# Altium PCB MCU_Ver1.PcbDoc
Units mil, origin at the board's own origin, x right, y up, seen from the top; angles counter-clockwise.
Board outline 2825.45 x 1434.1 mil, 2 copper layers (Top Layer, Bottom Layer); 41 components, 41 nets, 199 pads, 17 vias.
Unrouted connection lines stored in the file: 33.
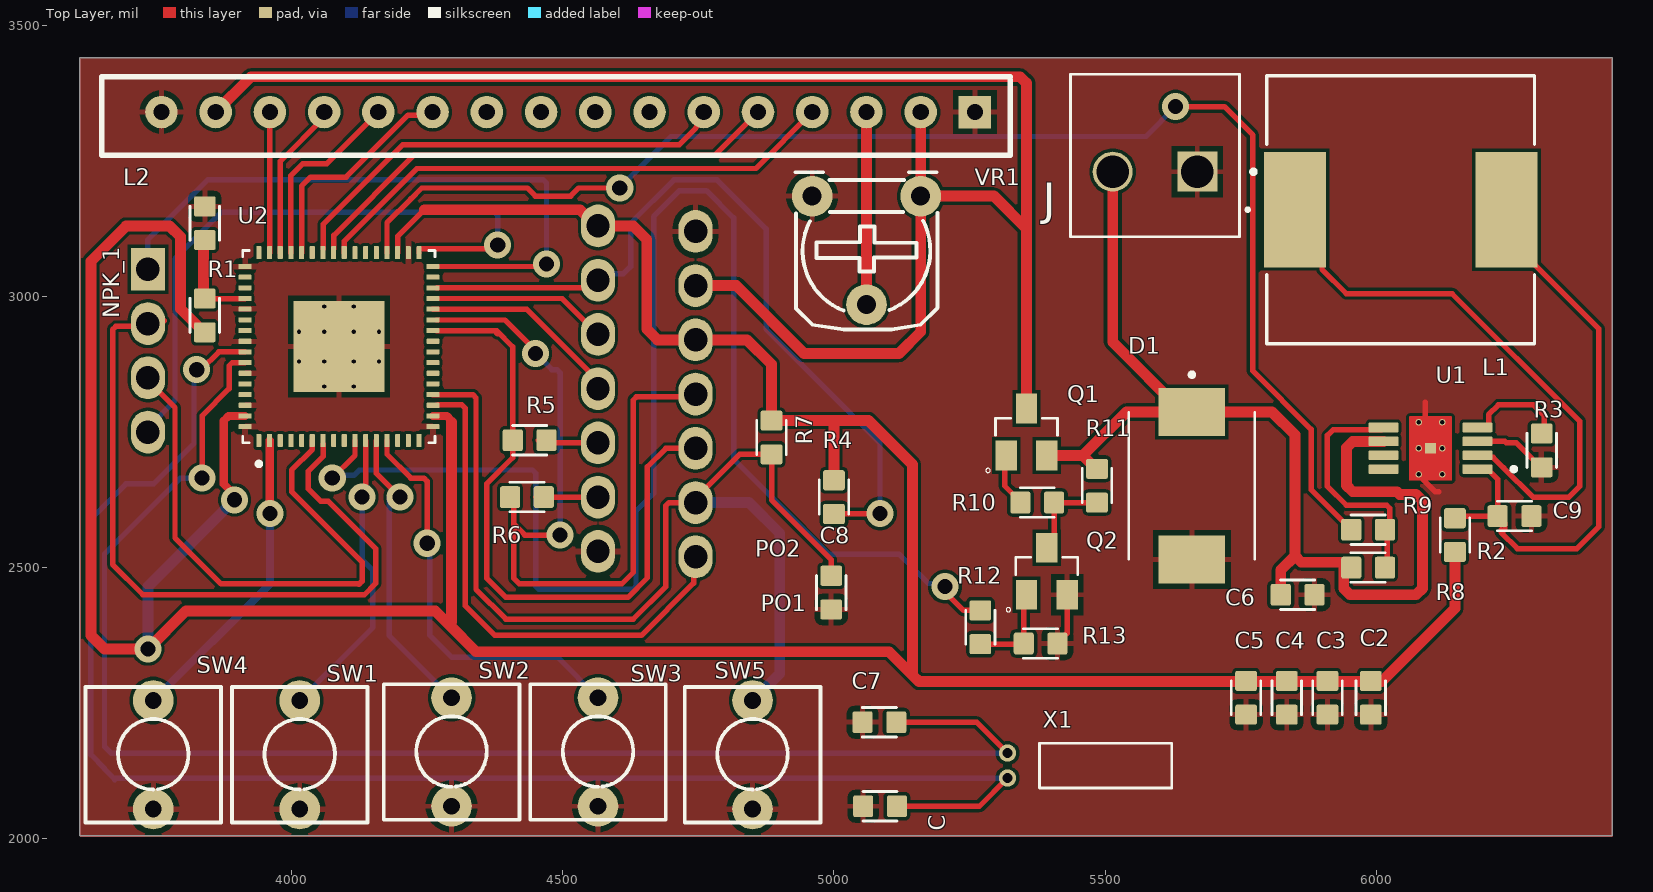
[diagram p0: Top Layer view]
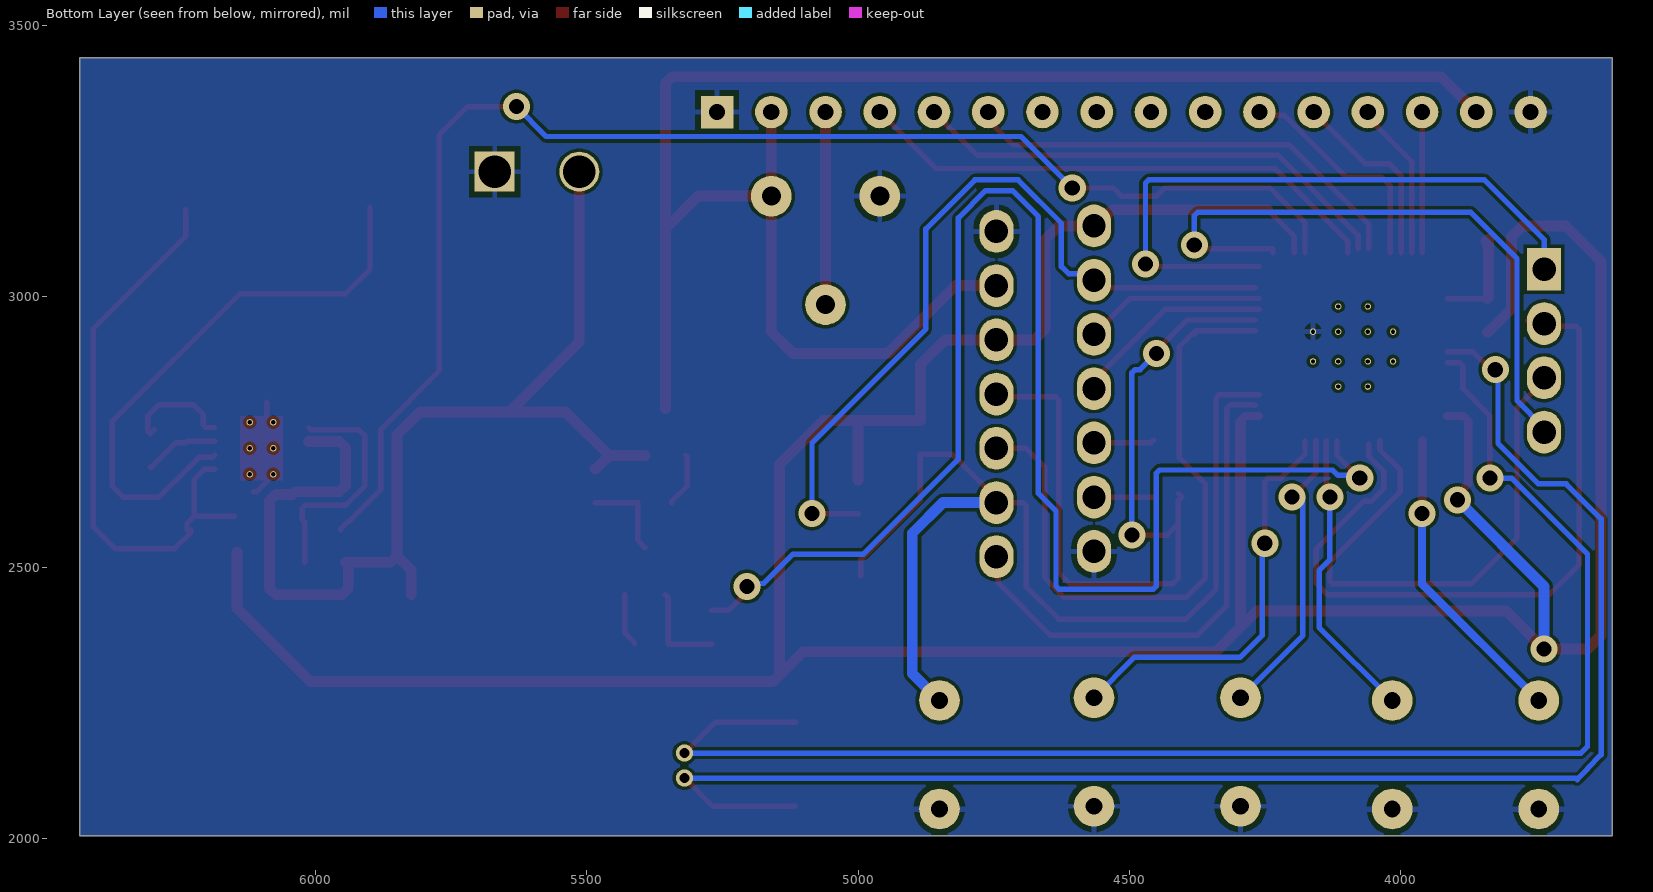
[diagram p1: Bottom Layer view, seen from below]
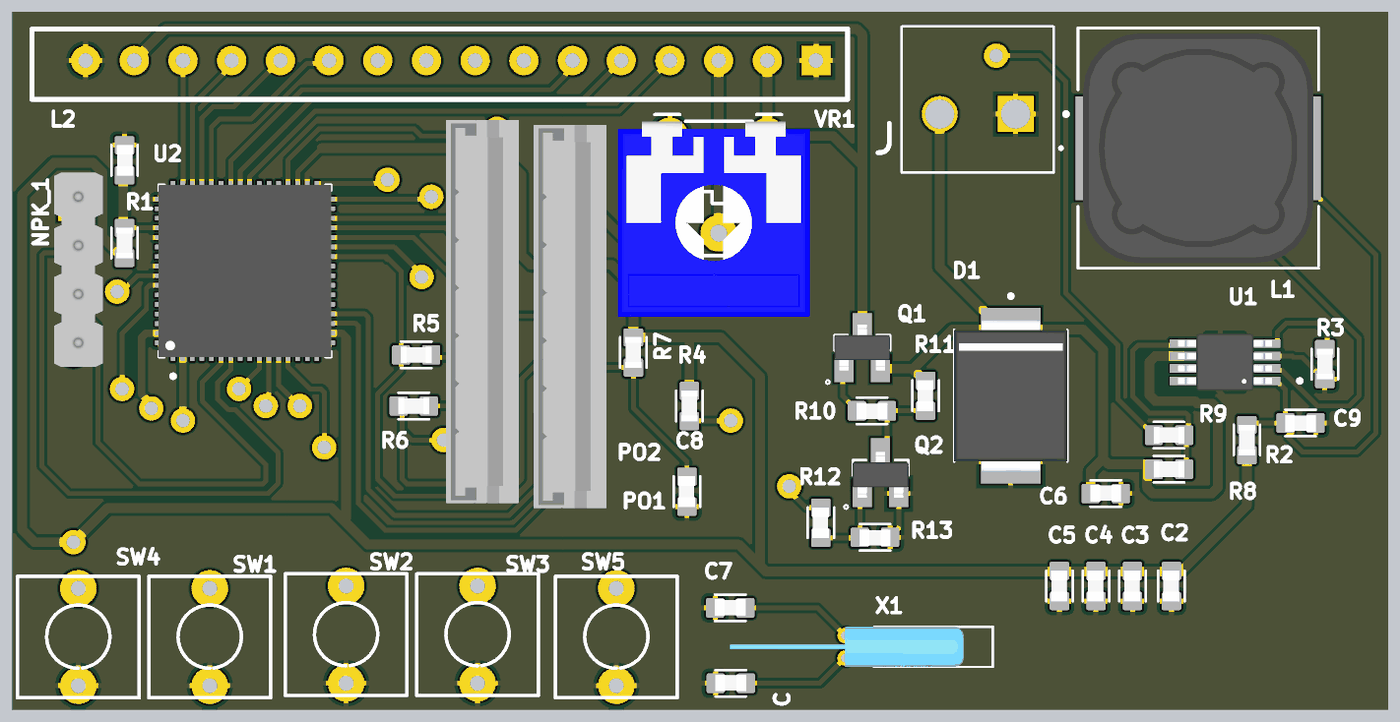
[diagram p2: 3D render of the assembled board from above, using the file's embedded part models]

## Layer stack, top to bottom
Top Solder: solder mask 0.4, Solder Resist, Dk 3.5
Top Layer: signal copper 1.4
Dielectric 1: dielectric 12.6, FR-4, Dk 4.8
Bottom Layer: signal copper 1.4
Bottom Solder: solder mask 0.4, Solder Resist, Dk 3.5

## Board outline
3609.55,2005.9 6435,2005.9 6435,3440 3609.55,3440

## Design rules (kind name [scope] priority, off if disabled: settings)
Clearance [All] p1: gap=5.91 ignorepadtopadclearanceinfootprint=FALSE
PolygonConnect [All] p1: connectstyle=Relief reliefconductorwidth=10 reliefentries=4 polygonreliefangle="90 Angle" airgapwidth=10
RoutingVias [All] p1: holewidth=28 width=50 viastyle="Through Hole" minholewidth=28 minwidth=50 maxholewidth=28 maxwidth=50
SolderMaskExpansion [All] p1: expansion=4 istentingtop=FALSE
Width [All] p1: maxlimit=20 minlimit=10 preferedwidth=15
30 further rules are at their usual default settings.

## Components (designator, comment, footprint, x,y, rotation, side; value= is the part's Value field where it differs from the comment)
C "22pF" CAPC0603X33N 5055,2060 r0 top
C1 "100n" CAPC0603X33N 3840,3165 r270 top
C2 "100n" CAPC0603X33N 5990,2230 r90 top
C3 "100n" CAPC0603X33N 5910,2230 r90 top
C4 "100n" CAPC0603X33N 5835,2230 r90 top
C5 "100n" CAPC0603X33N 5760,2230 r90 top
C6 "4.7u" CAPC0603X33N 5825,2450 r0 top
C7 "22pF" CAPC0603X33N 5053.9,2215 r0 top
C8 "1n1" CAPC0603X33N 4995,2423.9 r90 top
C9 "10u" CAPC0603X33N 6285,2595 r180 top
D1 "MBRS340T3" DIOM7959X261N 5660,2651.02 r270 top
J "640388-2" TE_640388-2 5670,3230 r0 top
L1 "2.2uH" IND_CDRH127/LDNP-470MC_SUM 6045,3160 r0 top
L2 "25/02/2025" PCBComponent_1#1 5260,3340 r180 top
NPK_1 "NPK" PCBComponent_1#2 3735,3050 r270 top
PO1 "MNTT 23/9/2023" PCBComponent_1#3 4565,3130 r270 top
PO2 "MNTT 23/9/2023" PCBComponent_1#3 4745,3120 r270 top
Q1 "FDN340P" SOT95P240X120-3N 5355,2750 r90 top
Q2 "MMBT3904LT1G" SOT95P240X111-3N 5392.6,2493.31 r90 top
R1 "0" RESC1608X50N 3840,2965 r90 top
R2 "0" RESC1608X50N 6145,2560 r270 top
R3 "52.3K" RESC1608X50N 6305,2716.1 r90 top
R4 "0" RESC1608X50N 5000,2630 r270 top
R5 "0" RESC1608X50N 4438.9,2735 r180 top
R6 "0" RESC1608X50N 4433.9,2630 r180 top
R7 "4k7" RESC1608X50N 4885,2740 r270 top
R8 "0" RESC1608X50N 5985,2500 r0 top
R9 "0" RESC1608X50N 5985,2570 r0 top
R10 "150" CAPC0603X33N 5405,2620 r180 top
R11 "10K" CAPC0603X33N 5485,2621.1 r90 top
R12 "4.7K" CAPC0603X33N 5270,2360 r90 top
R13 "47K" CAPC0603X33N 5411.1,2360 r180 top
SW1 "SW" SW2 4015,2255 r270 top value="SW chip 2 pin"
SW2 "SW" SW2 4295,2260 r270 top value="SW chip 2 pin"
SW3 "SW" SW2 4565,2260 r270 top value="SW chip 2 pin"
SW4 "SW" SW2 3745,2255 r270 top value="SW chip 2 pin"
SW5 "SW" SW2 4850,2255 r270 top value="SW chip 2 pin"
U1 "24/02/2025" SOP65P490X110-9N 6100,2720 r180 top
U2 "21/2/2025" IC_BQ500215RGCR 4087.36,2907.64 r90 top
VR1 "103" VR 5160,3185 r180 top value="VR 10K"
X1 "AB26T-32.768KHZ-E" XTAL_AB26T-32.768KHZ-E 5320,2135 r180 top

## Footprints (in the part's own frame and the unit in brackets; to place one, negate y for a bottom-side part, rotate by r counter-clockwise, add the part's x,y. Pads: shape width x height; smd on the part's side, far side on the other; paste and mask are expansions set on the pad)
CAPC0603X33N [mm]
  rrect20% 0.94x1.02 smd: 1(-0.028,0) 2(1.552,0)
  silkscreen extent -0.04,-0.69 1.56,0.69, body extent -0.04,-0.41 1.56,0.45, height 0.89
DIOM7959X261N [mm]
  rect 2.25x3.12 smd: A(3.455,0) C(-3.455,0)
  silkscreen extent -5.3,-2.95 3.44,2.95, body extent -3.98,-2.95 3.98,2.95, height 2.62
IC_BQ500215RGCR [mm]
  rrect25% 0.6x0.24 smd: 1(-4.4,3.75) 2(-4.4,3.25) 3(-4.4,2.75) 4(-4.4,2.25) 5(-4.4,1.75) 6(-4.4,1.25) 7(-4.4,0.75) 8(-4.4,0.25) 9(-4.4,-0.25) 10(-4.4,-0.75) 11(-4.4,-1.25) 12(-4.4,-1.75) 13(-4.4,-2.25) 14(-4.4,-2.75) 15(-4.4,-3.25) 16(-4.4,-3.75) 33(4.4,-3.75) 34(4.4,-3.25) 35(4.4,-2.75) 36(4.4,-2.25) 37(4.4,-1.75) 38(4.4,-1.25) 39(4.4,-0.75) 40(4.4,-0.25) 41(4.4,0.25) 42(4.4,0.75) 43(4.4,1.25) 44(4.4,1.75) 45(4.4,2.25) 46(4.4,2.75) 47(4.4,3.25) 48(4.4,3.75)
  rrect25% 0.24x0.6 smd: 17(-3.75,-4.4) 18(-3.25,-4.4) 19(-2.75,-4.4) 20(-2.25,-4.4) 21(-1.75,-4.4) 22(-1.25,-4.4) 23(-0.75,-4.4) 24(-0.25,-4.4) 25(0.25,-4.4) 26(0.75,-4.4) 27(1.25,-4.4) 28(1.75,-4.4) 29(2.25,-4.4) 30(2.75,-4.4) 31(3.25,-4.4) 32(3.75,-4.4) 49(3.75,4.4) 50(3.25,4.4) 51(2.75,4.4) 52(2.25,4.4) 53(1.75,4.4) 54(1.25,4.4) 55(0.75,4.4) 56(0.25,4.4) 57(-0.25,4.4) 58(-0.75,4.4) 59(-1.25,4.4) 60(-1.75,4.4) 61(-2.25,4.4) 62(-2.75,4.4) 63(-3.25,4.4) 64(-3.75,4.4)
  rect 4.25x4.25 smd paste-1.53: 65(0,0)
  round 0.3 hole 0.2 mask+0: 66(-0.695,1.875) 67(0.695,1.875) 68(-1.875,0.695) 69(-0.695,0.695) 70(0.695,0.695) 71(1.875,0.695) 72(-1.875,-0.695) 73(-0.695,-0.695) 74(0.695,-0.695) 75(1.875,-0.695) 76(-0.695,-1.875) 77(0.695,-1.875)
  silkscreen extent -5.59,-4.5 4.5,4.5, body extent -4.5,-4.5 4.5,4.5, height 1
IND_CDRH127/LDNP-470MC_SUM [mil]
  rect 114x213 smd: 1(-195,0) 2(195,0)
  silkscreen extent -285,-247 247,247, body extent -236,-236 236,236, height 315
PCBComponent_1#1 [mil]
  rect 60x60 hole 30: 1(0,0)
  round 60 hole 30: 2(100,0) 3(200,0) 4(300,0) 5(400,0) 6(500,0) 7(600,0) 8(700,0) 9(800,0) 10(900,0) 11(1000,0) 12(1100,0) 13(1200,0) 14(1300,0) 15(1400,0) 16(1500,0)
  silkscreen extent -65,-65 1610,80
PCBComponent_1#2 [mil]
  rect 78.74x62.99 hole 43.41: 1(0,0)
  oval 78.74x62.99 hole 43.41: 2(100,0) 3(200,0) 4(300,0)
  body extent -60,-40 340,60, height 252
PCBComponent_1#3 [mil]
  oval 78.74x62.99 hole 43.31: 1(0,0) 2(100,0) 3(200,0) 4(300,0) 5(400,0) 6(500,0) 7(600,0)
  body extent -87,-65 700,85, height 300
RESC1608X50N [mm]
  rrect20% 0.94x1.02 smd: 1(-0.79,0) 2(0.79,0)
  silkscreen extent -0.8,-0.69 0.8,0.69, body extent -0.8,-0.43 0.8,0.43, height 0.48
SOP65P490X110-9N [mm]
  rrect20% 1.4x0.45 smd mask+0: 1(-2.2,0.975) 2(-2.2,0.325) 3(-2.2,-0.325) 4(-2.2,-0.975) 5(2.2,-0.975) 6(2.2,-0.325) 7(2.2,0.325) 8(2.2,0.975)
  rect 0.5x0.5 smd paste-1 mask+0: 9(0,0)
  round 0.3 hole 0.2 mask+0: 10(-0.55,1.22) 11(0.55,1.22) 12(-0.55,0) 13(0.55,0) 14(-0.55,-1.22) 15(0.55,-1.22)
  Top Layer region: 0.958,1.499 0.96,1.499 0.963,1.498 0.965,1.498 0.968,1.497 0.97,1.496 0.973,1.495 0.975,1.493 0.977,1.492 0.979,1.49 0.981,1.489 0.983,1.487 0.985,1.485 0.987,1.483 0.989,1.481 0.99,1.479 0.992,1.477 0.993,1.475 0.995,1.473 0.996,1.47 0.997,1.468 0.998,1.465 0.998,1.463 0.999,1.46 0.999,1.458 1,1.455 1,1.453 1,1.45 1,-1.45 1,-1.453 1,-1.455 0.999,-1.458 0.999,-1.46 0.998,-1.463 0.998,-1.465 0.997,-1.468 0.996,-1.47 0.995,-1.473 0.993,-1.475 0.992,-1.477 0.99,-1.479 0.989,-1.481 0.987,-1.483 0.985,-1.485 0.983,-1.487 0.981,-1.489 0.979,-1.49 0.977,-1.492 0.975,-1.493 0.973,-1.495 0.97,-1.496 0.968,-1.497 0.965,-1.498 0.963,-1.498 0.96,-1.499 0.958,-1.499 0.955,-1.5 -0.955,-1.5 -0.958,-1.499 -0.96,-1.499 -0.963,-1.498 -0.965,-1.498 -0.968,-1.497 -0.97,-1.496 -0.973,-1.495 -0.975,-1.493 -0.977,-1.492 -0.979,-1.49 -0.981,-1.489 -0.983,-1.487 -0.985,-1.485 -0.987,-1.483 -0.989,-1.481 -0.99,-1.479 -0.992,-1.477 -0.993,-1.475 -0.995,-1.473 -0.996,-1.47 -0.997,-1.468 -0.998,-1.465 -0.998,-1.463 -0.999,-1.46 -0.999,-1.458 -1,-1.455 -1,-1.453 -1,-1.45 -1,1.45 -1,1.453 -1,1.455 -0.999,1.458 -0.999,1.46 -0.998,1.463 -0.998,1.465 -0.997,1.468 -0.996,1.47 -0.995,1.473 -0.993,1.475 -0.992,1.477 -0.99,1.479 -0.989,1.481 -0.987,1.483 -0.985,1.485 -0.983,1.487 -0.981,1.489 -0.979,1.49 -0.977,1.492 -0.975,1.493 -0.973,1.495 -0.97,1.496 -0.968,1.497 -0.965,1.498 -0.963,1.498 -0.96,1.499 -0.958,1.499 -0.955,1.5 0.955,1.5
  silkscreen extent -4,0.88 -3.8,1.07, body extent -2.45,-1.5 2.45,1.5, height 1.1
SOT95P240X111-3N [mm]
  rect 1.4x1 smd: 1(-1.1,0.95) 2(-1.1,-0.95) 3(1.1,0)
  silkscreen extent -1.9,-1.45 0.65,1.9, body extent -1.33,-1.46 1.07,1.46, height 1.21
SOT95P240X120-3N [mm]
  rect 1.4x1 smd: 1(-1.1,0.95) 2(-1.1,-0.95) 3(1.1,0)
  silkscreen extent -1.9,-1.45 0.65,1.9, body extent -1.2,-1.46 1.2,1.46, height 1.21
SW2 [mil] "SW button 2pin, 250x 250 mil"
  round 75 hole 31: 1(0,0) 2(200,0)
  silkscreen extent -25,-125 225,125
TE_640388-2 [mil]
  rect 73.78x73.78 hole 60: 1(0,0)
  round 73.78 hole 60: 2(-155.91,0)
  silkscreen extent -234,-120 107,180
VR [mil] "Resistor Variable"
  round 75 hole 35: 1(0,0) 2(100,200) 3(200,0)
  silkscreen extent -31,-44 231,246, body extent -87,-30 307,372, height 165
XTAL_AB26T-32.768KHZ-E [mm]
  round 0.81 hole 0.46: 1(0,0.585) 2(0,-0.585)
  silkscreen extent -7.7,-1.05 -1.5,1.05, body extent -6.2,-1.05 6,1.06, height 1.05

## Part data
C C1 C2 C3 C4 C5 C6 C7 C8 C9: library part GRM033R71H102KA12D, "SMD Capacitor X7R_EIA_ with Capacitance: 1000pF Tol. 10%. Rated Voltage: 50Vdc", Package="0603 Taiyo Yuden", Digi-Key_Part_Number=490-10682-1-ND, Digi-Key_Purchase_URL=https://www.digikey.com/product-detail/en/murata-electronics/GRM033R71H102KA12D/490-10682-1-ND/5251423?utm_source=snapeda&utm_medium=aggregator&utm_campaign=symbol, MF=Murata, MP=GRM033R71H102KA12D, SnapEDA_Link=https://www.snapeda.com/parts/GRM033R71H102KA12D/Murata/view-part/4374985/?ref=snap
D1: "Diode Schottky 40V 4A Surface Mount SMC", Package="SMC-2 ON Semiconductor", Check_prices=https://www.snapeda.com/parts/MBRS340T3/Onsemi/view-part/?ref=eda, MF="ON Semiconductor", MP=MBRS340T3, SnapEDA_Link=https://www.snapeda.com/parts/MBRS340T3/Onsemi/view-part/?ref=snap
J: "Header; Conn; Interconnect System; PCB Plug; 2 Cont; Solder; MTA-156 Series; Straight", Package=None, Availability=Unavailable, EU_RoHS_Compliance=Compliant, MF="TE Connectivity", MP=640388-2, Price=None, SnapEDA_Link=https://www.snapeda.com/parts/640388-2/TE%20Connectivity%20AMP%20Connectors/view-part/437691/?ref=snap, TE_purchase_URL=https://www.te.com/usa-en/product-640388-2.html?te_bu=Cor&te_type=disp&te_campaign=seda_glo_cor-seda-global-disp-prtnr-fy19-seda-model-bom-cta_sma-317_1&elqCampaignId=32493
L1: library part CDRH127/LDNP-470MC, "47 ÂµH Shielded - Inductor 3.25 A 78mOhm Max Nonstandard", Package="Nonstandard Sumida", Availability="In Stock", Check_prices=https://www.snapeda.com/parts/CDRH127/LDNP-470MC/Sumida+America+Components+Inc./view-part/?ref=eda, MF="Sumida America", MP=CDRH127/LDNP-470MC, Price=None, Purchase-URL=https://pricing.snapeda.com/search/part/CDRH127/LDNP-470MC/?ref=eda, SnapEDA_Link=https://www.snapeda.com/parts/CDRH127/LDNP-470MC/Sumida+America+Components+Inc./view-part/?ref=snap
L2: library part LCD1602
NPK_1: "02/04/2024. NPK_?"
PO1 PO2: library part "Port 7 pins"
Q1: "FDN340P Series 20V 70 mOhm Single P-Ch Logic Level PowerTrench Mosfet SSOT-3", Package=None, Availability=Unavailable, MP=FDN340P, Price=None
Q2: "Bipolar _BJT_ Transistor NPN 40V 200mA 300MHz 300mW Surface Mount SOT-23-3 _TO-236_", Package="SOT-23-3 NXP Semiconductors", Availability=Unavailable, MF="ON Semiconductor", MP=MMBT3904LT1G, Price=None, SnapEDA_Link=https://www.snapeda.com/parts/MMBT3904LT1G/ON%20Semiconductor/view-part/587490/?ref=snap
R1 R2 R3 R4 R5 R6 R7 R8 R9 R10 R11 R12 R13: library part CRGS0603J180K, "RES SMD 180K OHM 5% 1/4W 0603", Package=None, Availability=Unavailable, MP=CRGS0603J180K, Price=None
SW1 SW2 SW3 SW4 SW5: library part SW2, "Switch button 2 pin"
U1: library part TPS62842DGRR
U2: library part MSP430FR5989_VER2
VR1: library part VR, "Var Resistor"
X1: "32.768kHz WATCH CRYSTAL, 6.2 x 02.1MM CYLINDER PACKAGE", Package="Radial Abracon LLC", Check_prices=https://www.snapeda.com/parts/AB26T-32.768KHZ-E/Abracon/view-part/?ref=eda, MF="Abracon LLC", MP=AB26T-32.768KHZ-E, SnapEDA_Link=https://www.snapeda.com/parts/AB26T-32.768KHZ-E/Abracon/view-part/?ref=snap

## Via types
v1: diameter 50, hole 28, Top Layer to Bottom Layer, 17 vias

## Nets (pads, with @x,y where several pads share a name; then routed paths per layer and width w, separated by ;. In a path a pad name is that pad's centre, name@x,y a point inside that pad or via, vN(x,y) a via of type N, cw(c..) or ccw(c..) an arc to the next point about the centre after c; other vN are vias at no path point)
3V3: C2.2 C3.2 C4.2 C5.2 PO1.1 PO2.3 R1.1 R2.2 R4.1 R7.1 U2.18 U2.35 U2.63 | length 6660.3
  Top Layer w10: U2.35 4195.63,3110.63 4245,3160
  Top Layer w15: v1(3895,2625) 3895,2634.47 3875,2654.47 3875,2770.9 3883.79,2779.68 U2.63 ; U2.18 4286.21,2779.68 4295,2770.9 4295,2767.93
  Top Layer w20: R1.1 3838.43,2933.9 3795,2977.32 3795,3110 3775,3130 3695,3130 3630,3065 3630,2375 3655,2350 v1(3735,2350) 3805,2420 4265,2420 4290,2395 ; 4245,3160 4531.79,3160 4561.79,3130 4630,3130 4655,3105 4655,2940 4675,2920 PO2.3 4840,2920 4885,2875 R7.1 4995,2771.1 ; 4295,2767.93 4295,2400 4290,2395 ; R4.1 5000,2766.1 4995,2771.1 ; R2.2 6145,2425 6010,2290 5156.72,2290 5145,2301.72 ; 4290,2395 4340,2345 5101.72,2345 5145,2301.72 ; 4995,2771.1 5063.9,2771.1 5145,2690 5145,2301.72
  Bottom Layer w20: v1(3735,2350) 3735,2465 v1(3895,2625)
5V: L2.2 L2.15 PO2.2 Q1.3 VR1.1 | length 3235
  Top Layer w20: L2.15 3925,3405 5343.28,3405 5355,3393.28 5355,3125 ; PO2.2 4820,3020 4945,2895 5120,2895 5160,2935 VR1.1 ; L2.2 VR1.1 ; Q1.3 5355,3125 ; VR1.1 5295,3185 5355,3125
5VControl: R12.2 U2.10 | length 2772.9
  Top Layer w10: v1(4075,2665) 4116.89,2706.89 U2.10 ; v1(5205,2465) 5205,2455 5238.9,2421.1 R12.2
  Bottom Layer w10: v1(4075,2665) 4080,2670 4115,2670 4125,2680 4444.14,2680 4450,2674.14 4450,2465.86 4455.86,2460 4629.14,2460 4635,2465.86 4635,2604.37 4667.5,2636.87 4667.5,3147.5 4715,3195 4765,3195 4815,3145 4815,2700 4990,2525 5120,2525 5174.22,2470.78 5199.22,2470.78 v1(5205,2465)
AVCC: C1.2 R1.2 U2.52 | length 187.9
  Top Layer w10: R1.2@3840.06,2996.16 U2.52 U2.52 ; C1.2@3845,3095 C1.2@3845.06,3095.06
  Top Layer w20: C1.2@3837.5,3105.3 3837.5,2998.6 R1.2 ; C1.2 C1.2@3842.5,3101.4
BT1: SW1.1 U2.11 | length 546.3
  Top Layer w10: v1(4130,2630) 4136.57,2636.57 U2.11
  Bottom Layer w10: SW1.1 4150,2390 4150,2494.59 4130,2514.59 v1(4130,2630)
BT2: SW2.1 U2.12 | length 560.2
  Top Layer w10: U2.12 4156.26,2673.74 v1(4200,2630)
  Bottom Layer w10: v1(4200,2630) 4180,2630 4180,2375 SW2.1
BT3: SW3.1 U2.13 | length 763.9
  Top Layer w10: U2.13 4175.94,2709.06 4220,2665 4244.14,2665 4250,2659.14 v1(4250,2545)
  Bottom Layer w10: v1(4250,2545) 4255,2540 4255,2375 4295,2335 4490,2335 SW3.1
BT4_ISR: SW4.1 U2.2 | length 568.7
  Top Layer w15: U2.2 3959.7,2734.11 3959.7,2600.3 v1(3960,2600)
  Bottom Layer w15: SW4.1 3960,2470 v1(3960,2600)
D4: L2.11 U2.44 | length 420.7
  Top Layer w10: U2.44 4018.46,3203.46 4035,3220 4100.73,3220 4215,3334.26 4254.27,3334.26 L2.11
D5: L2.12 U2.45 | length 351.8
  Top Layer w10: U2.45 3998.78,3222.92 4020.86,3245 4065,3245 L2.12
D6: L2.13 U2.46 | length 292.6
  Top Layer w10: U2.46 3979.09,3249.09 4060,3330 L2.13
D7: L2.14 U2.47 | length 259.4
  Top Layer w10: U2.47 3959.41,3087.4 3960,3087.99 L2.14
DE: NPK_1.3 U2.6 | length 1027.8
  Top Layer w10: NPK_1.3 3735,2845 3785,2795 3785,2555 3870,2470 4123.28,2470 4124.14,2469.14 4130,2475 4130,2510 4000,2640 4000,2680 4038.15,2718.15 U2.6
DI: NPK_1.4 U2.33 | length 1182.2
  Top Layer w10: U2.33 4235,3087.4 4235.28,3087.68 4372.68,3087.68 v1(4380,3095)
  Bottom Layer w10: NPK_1.4 3735,2757.87 3785,2807.87 3785,3070 3870,3155 4374.14,3155 4380,3149.14 v1(4380,3095)
E: L2.6 U2.42 | length 841.8
  Top Layer w10: U2.42@4058.11,3087.68 4058.11,3133.11 4205,3280 4715,3280 4737.29,3302.29 4745.68,3310.68 4745.68,3312.15 4760,3326.47 L2.6
GND: C1.1 C2.1 C3.1 C4.1 C5.1 C6.2 C7.1 C8.1 C9.1 C.1 D1.A J.1 L2.1 L2.16 PO1.7 PO2.1 Q2.2 R3.1 R13.1 SW1.2 SW2.2 SW3.2 SW4.2 SW5.2 U1.3 U1.8 U1.9 U2.17 U2.34 U2.49 U2.53 U2.56 U2.59 U2.62 U2.64 U2.65 U2.77 VR1.3 | length 335.2
  Top Layer w10: R13.1 5412.2,2361.57 5430,2379.37 Q2.2 ; 6070,2678.63 6108.63,2640 ; 6090,2760 6090,2805 ; U1.3 6237.2,2732.8 6240,2730 6258.43,2730 6303.43,2685 R3.1
LFXIN: C.2 U2.57 X1.1 | length 2859.9
  Top Layer w10: v1(3825,2865) 3833.05,2865 3865.84,2897.8 U2.57 ; C.2 5268.03,2060 X1.1
  Bottom Layer w10: v1(3825,2865) 3820,2860 3820,2729.07 3745.46,2654.53 3694.53,2654.53 3630,2590 3630,2155 3655,2130 3655,2128.28 3674.14,2109.14 3676.97,2111.97 X1.1
LFXOUT: C7.2 U2.58 X1.2 | length 2751.1
  Top Layer w10: v1(3835,2665) 3835,2780 3885,2830 3885,2872.25 3890.86,2878.11 U2.58 ; C7.2 5263.03,2215 X1.2
  Bottom Layer w10: v1(3835,2665) 3795,2665 3655,2525 3655,2170 3666.97,2158.03 X1.2
NetC9_2: C9.2 L1.2 R2.1 U1.1 | length 1086.9
  Top Layer w10: R2.1@6150,2595 C9.2 ; U1.1 6205.31,2681.61 6223.9,2663.03 C9.2 ; 6230,2570 6230,2565 6260,2535 6370,2535 6410,2575 6410,2940.5 6240,3110.5 L1.2 ; 6237.4,2570 6237.4,2581.5 C9.2
NetL1_1: L1.1 U1.2 | length 1054.6
  Top Layer w10: L1.1@5900,3165 5900,3050 5945,3005 6140,3005 6375,2770 6375,2650 6355,2630 6289.03,2630 6235.04,2683.99 6215.68,2703.35 6190.47,2703.35 U1.2
NetL2_3: L2.3 VR1.2 | length 355
  Top Layer w20: VR1.2 L2.3
NetPO1_5: PO1.5 R5.1 | length 112.1
  Top Layer w10: R5.1@4455,2735 4460,2730 PO1.5
NetPO1_6: PO1.6 R6.1 | length 115
  Top Layer w10: R6.1@4450,2630 PO1.6
NetQ1_1: Q1.1 R10.2 | length 99.7
  Top Layer w10: Q1.1 5315,2704.09 5315,2650.47 5343.9,2621.57 R10.2
NetQ2_1: Q2.1 R12.1 R13.2 | length 172.6
  Top Layer w10: R12.1 5348.9,2358.9 R13.2 5350,2444.8 Q2.1
NetQ2_3: Q2.3 R10.1 R11.1 | length 167.9
  Top Layer w10: Q2.3 5406.1,2550.12 R10.1 R11.1
NetR3_2: R3.2 U1.4 | length 205.9
  Top Layer w10: U1.4 6203.54,2758.39 6207.4,2762.24 6207.4,2782.4 6225,2800 6290,2800 6310,2780 6310,2752.2 R3.2 R3.2@6297.68,2754.53
NetR8_2: R8.2 R9.2 U1.5 | length 436.4
  Top Layer w10: U1.5 6009.53,2754.53 5994.69,2754.53 5920.74,2754.53 5910,2743.79 5910,2650 5945,2615 6019.14,2615 6025,2609.14 6025,2588.9 6020.55,2584.45 6020.55,2510.55 R8.2@6020,2510
PS_EN: R9.1 U2.36 | length 2578
  Top Layer w10: U2.36 4175.94,3135.94 4219.82,3179.82 4240,3200 4434.59,3200 4449.59,3185 4514.38,3185 4529.38,3200 v1(4605,3200) ; v1(5630,3350) 5720,3350 5772.5,3297.5 5772.5,2862.5 5880,2755 5880,2643.9 5938.82,2585.08 5940.39,2585.08 5953.9,2571.57 R9.1
  Bottom Layer w10: v1(4605,3200) 4700,3295 5575,3295 v1(5630,3350)
RE: NPK_1.2 U2.7 | length 1379.3
  Top Layer w10: NPK_1.2@3765,2955 3755,2945 3675.86,2945 3670,2939.14 3670,2505.86 3725.86,2450 4134.14,2450 4155,2470.86 4155,2535 4067.5,2622.5 4053.71,2622.5 4030.7,2645.52 4030.7,2677.59 4058.11,2705 U2.7@4058.11,2727.6
RO: NPK_1.1 U2.32 | length 1198.5
  Top Layer w10: U2.32 4465.28,3055.28 v1(4470,3060)
  Bottom Layer w10: NPK_1.1 3735,3105 3845,3215 4464.14,3215 4470,3209.14 v1(4470,3060)
RS: L2.4 U2.40 | length 982.6
  Top Layer w10: U2.40 4097.2,3102.2 4230.91,3235.91 4855.91,3235.91 L2.4
RW: L2.5 U2.41 | length 901.4
  Top Layer w10: U2.41@4077.8,3087.68 4077.8,3112.8 4225,3260 4780,3260 L2.5
RXD1: PO2.4 R6.2 U2.27 | length 1495.7
  Top Layer w10: U2.27@4267.4,2956.57 4393.43,2956.57 4450,2900 v1(4450,2895) ; R6.2@4409.22,2636.43 R6.2 4410,2622.8 4410,2580 ; v1(4495,2560) 4430,2560 4410,2580 ; PO2.4 4740,2815 4635.86,2815 4630,2809.14 4630,2491.21 4608.79,2470 4420,2470 4410,2480 4410,2580
  Bottom Layer w10: v1(4450,2895) 4480,2865 4489.14,2865 4495,2859.14 v1(4495,2560)
SBWTCK: PO2.7 U2.19 | length 953.5
  Top Layer w10: U2.19@4267.4,2799.65 4269.64,2799.65 4269.99,2800 4314.14,2800 4320,2794.14 4320,2430 4375,2375 4645,2375 4741.49,2471.49 4741.49,2516.49 PO2.7
SBWTDIO: C8.2 PO2.6 R7.2 SW5.1 U2.20 | length 1997.6
  Top Layer w10: U2.20 4334.14,2819.06 4340,2813.2 4340,2460 4395,2405 4630,2405 4690,2465 4690,2614.14 4695.86,2620 PO2.6 4745,2627.87 4826.02,2708.9 R7.2 4885,2625 4995,2515 C8.2
  Bottom Layer w20: PO2.6 4843.28,2620 4900,2563.28 4900,2305 SW5.1
SIM_MASTER: PO1.2 R4.2 U2.30 | length 1471.5
  Top Layer w10: U2.30@4267.4,3015.91 4550.91,3015.91 PO1.2 ; R4.2 5000.55,2599.45 5084.45,2599.45 v1(5085,2600)
  Bottom Layer w10: PO1.2 4576.5,3041.5 4611.5,3041.5 4625,3055 4625,3135 4705,3215 4784.74,3215 4875,3124.74 4875,2940 5085,2730 v1(5085,2600)
SIM_PWR: PO1.4 U2.28 | length 373.9
  Top Layer w10: U2.28 4433.46,2976.54 4490,2920 4565,2845 PO1.4
SIM_RST: PO1.3 U2.29 | length 331.8
  Top Layer w10: U2.29 4498.78,2996.22 PO1.3
TXD1: PO2.5 R5.2 U2.26 | length 1241.5
  Top Layer w10: U2.26@4267.4,2936.89 4374.14,2936.89 ; 4380,2931.03 4374.14,2936.89 ; PO2.5 4690,2720 4655.82,2685.82 4655.82,2480.82 4620,2445 4395,2445 4360,2480 4360,2655 4407.8,2702.8 R5.2 4407.8,2907.2 4378.11,2936.89 4374.14,2936.89
Vout: C6.1 D1.C J.2 Q1.2 R8.1 R11.2 U1.6 | length 2107.5
  Top Layer w20: Q1.2 5458.94,2706.69 ; R11.2 5483.43,2682.2 5458.94,2706.69 ; J.2 5514.09,2915.83 D1.C@5642.87,2787.05 ; C6.1 5823.9,2495.61 5850,2521.72 ; U1.6 5956.72,2732.8 5945,2721.08 5945,2651.72 5956.72,2640 6038.28,2640 6043.28,2635 6073.28,2635 6085,2623.28 6085,2461.72 6073.28,2450 5951.72,2450 5940,2461.72 5940,2505 5945,2510 5861.72,2510 5850,2521.72 ; 5458.94,2706.69 5539.29,2787.05 D1.C@5642.87,2787.05 ; D1.C@5642.87,2787.05 D1.C 5807.95,2787.05 5850,2745 5850,2521.72
pads on no net: L2.7 L2.8 L2.9 L2.10 U1.7 U1.10 U1.11 U1.12 U1.13 U1.14 U1.15 U2.1 U2.3 U2.4 U2.5 U2.8 U2.9 U2.14 U2.15 U2.16 U2.21 U2.22 U2.23 U2.24 U2.25 U2.31 U2.37 U2.38 U2.39 U2.43 U2.48 U2.50 U2.51 U2.54 U2.55 U2.60 U2.61 U2.66 U2.67 U2.68 U2.69 U2.70 U2.71 U2.72 U2.73 U2.74 U2.75 U2.76
copper on no net: | length 44.7
  Top Layer w10: 6070,2678.63 6070,2680 ; 6080,2690 6082.13,2687.87 6084.93,2687.87 6105.75,2667.06 6105.75,2665.38 ; 6108.63,2640 6115,2640

## Polygon pours and split planes (outlines as drawn)
GND on Top Layer "GND_L01_P002" (solid, pour order 2): 6435,2005 6435,3440 3610,3440 3610,2005
GND on Top Layer "GND_L01_P000" (solid, pour order 0): 6435,2005 6435,3440 3610,3440 3610,2005
GND on Bottom Layer "GND_L02_P003" (solid, pour order 3): 6435,3440 6435,2005 3610,2005 3610,3435 3605,3440